# EAGLE board SmartMirror (EAGLE 9.6.2)
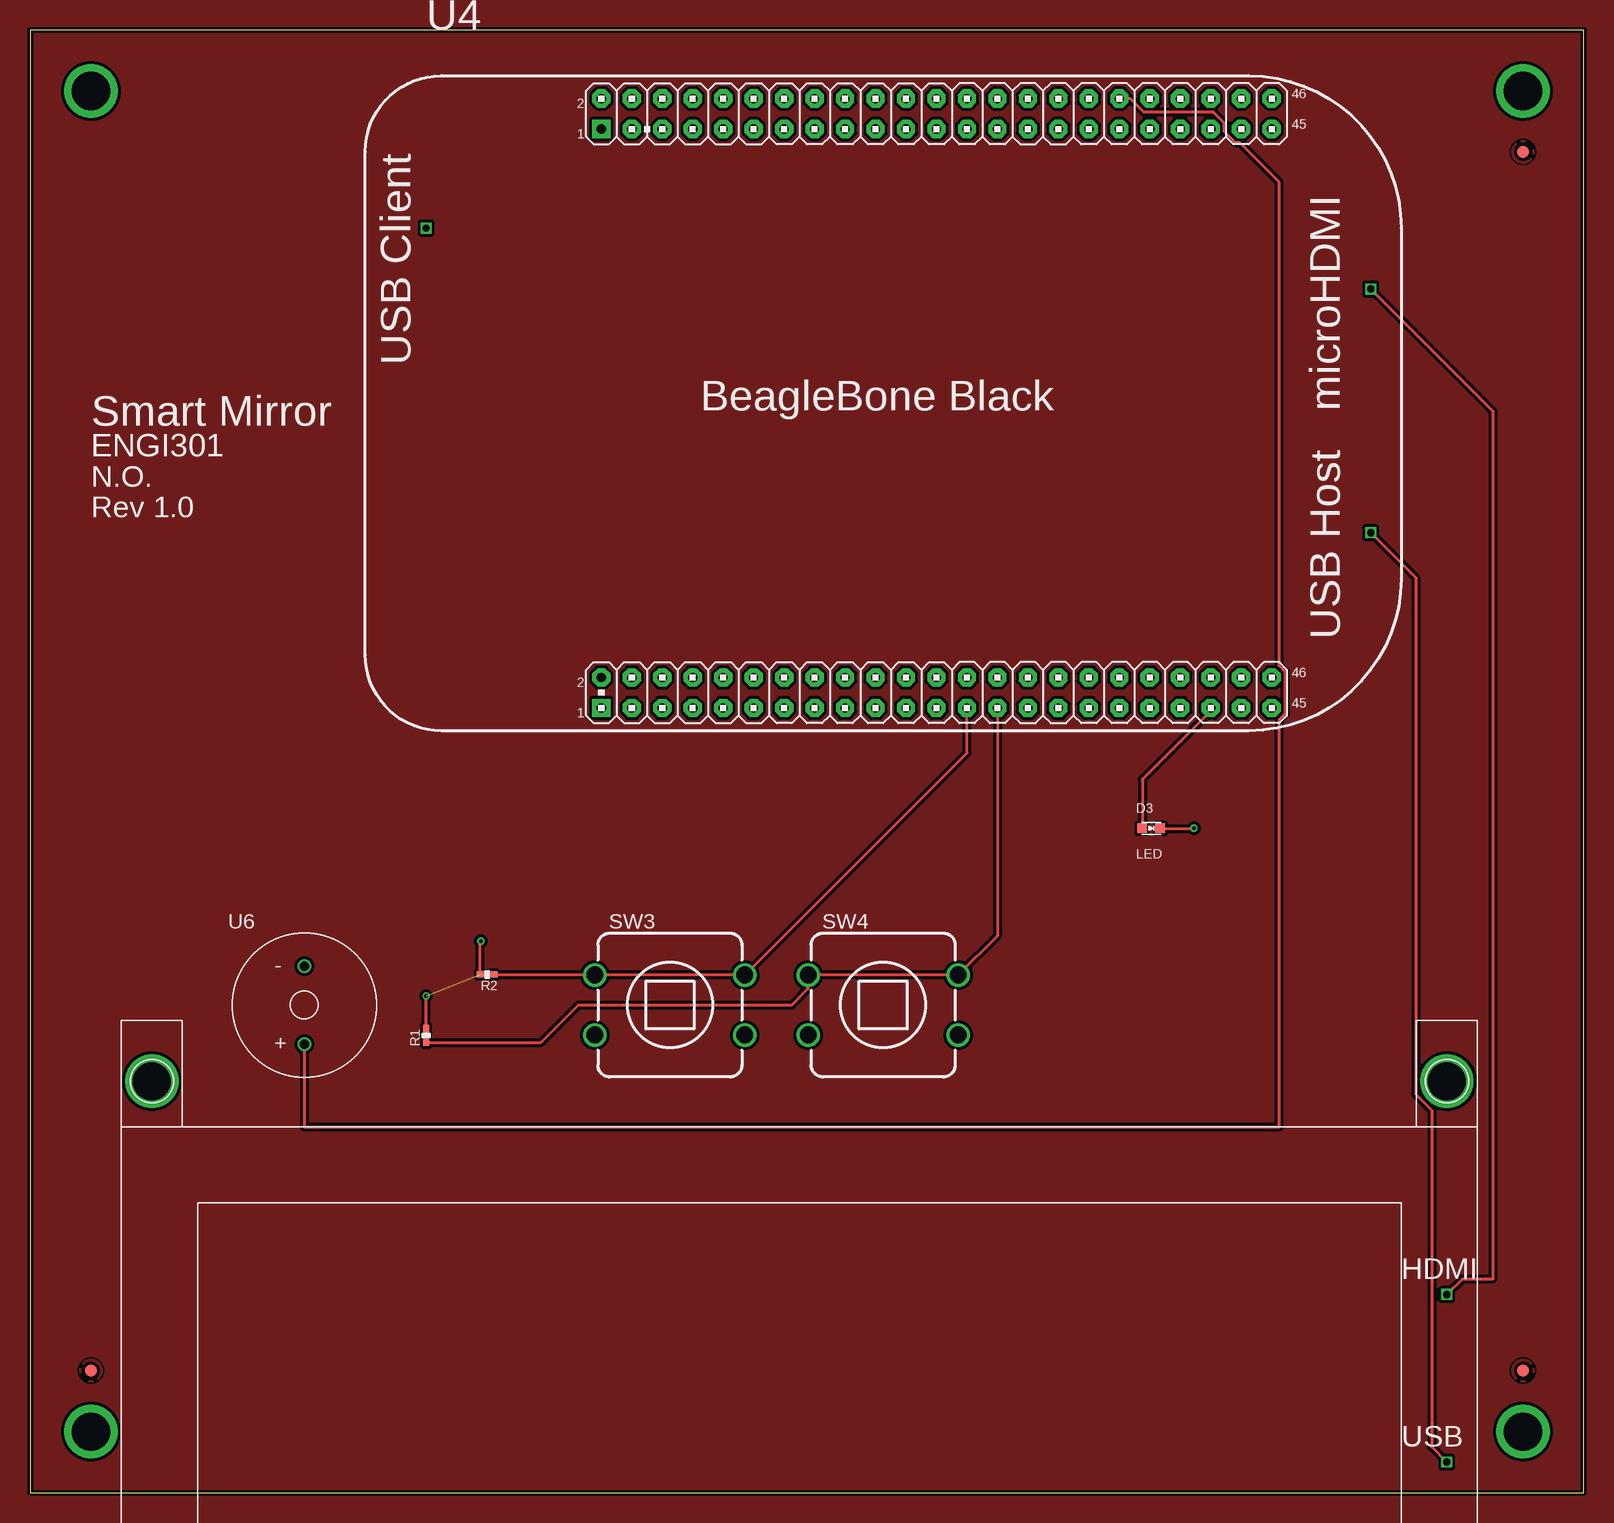
[diagram p0: board, top side]
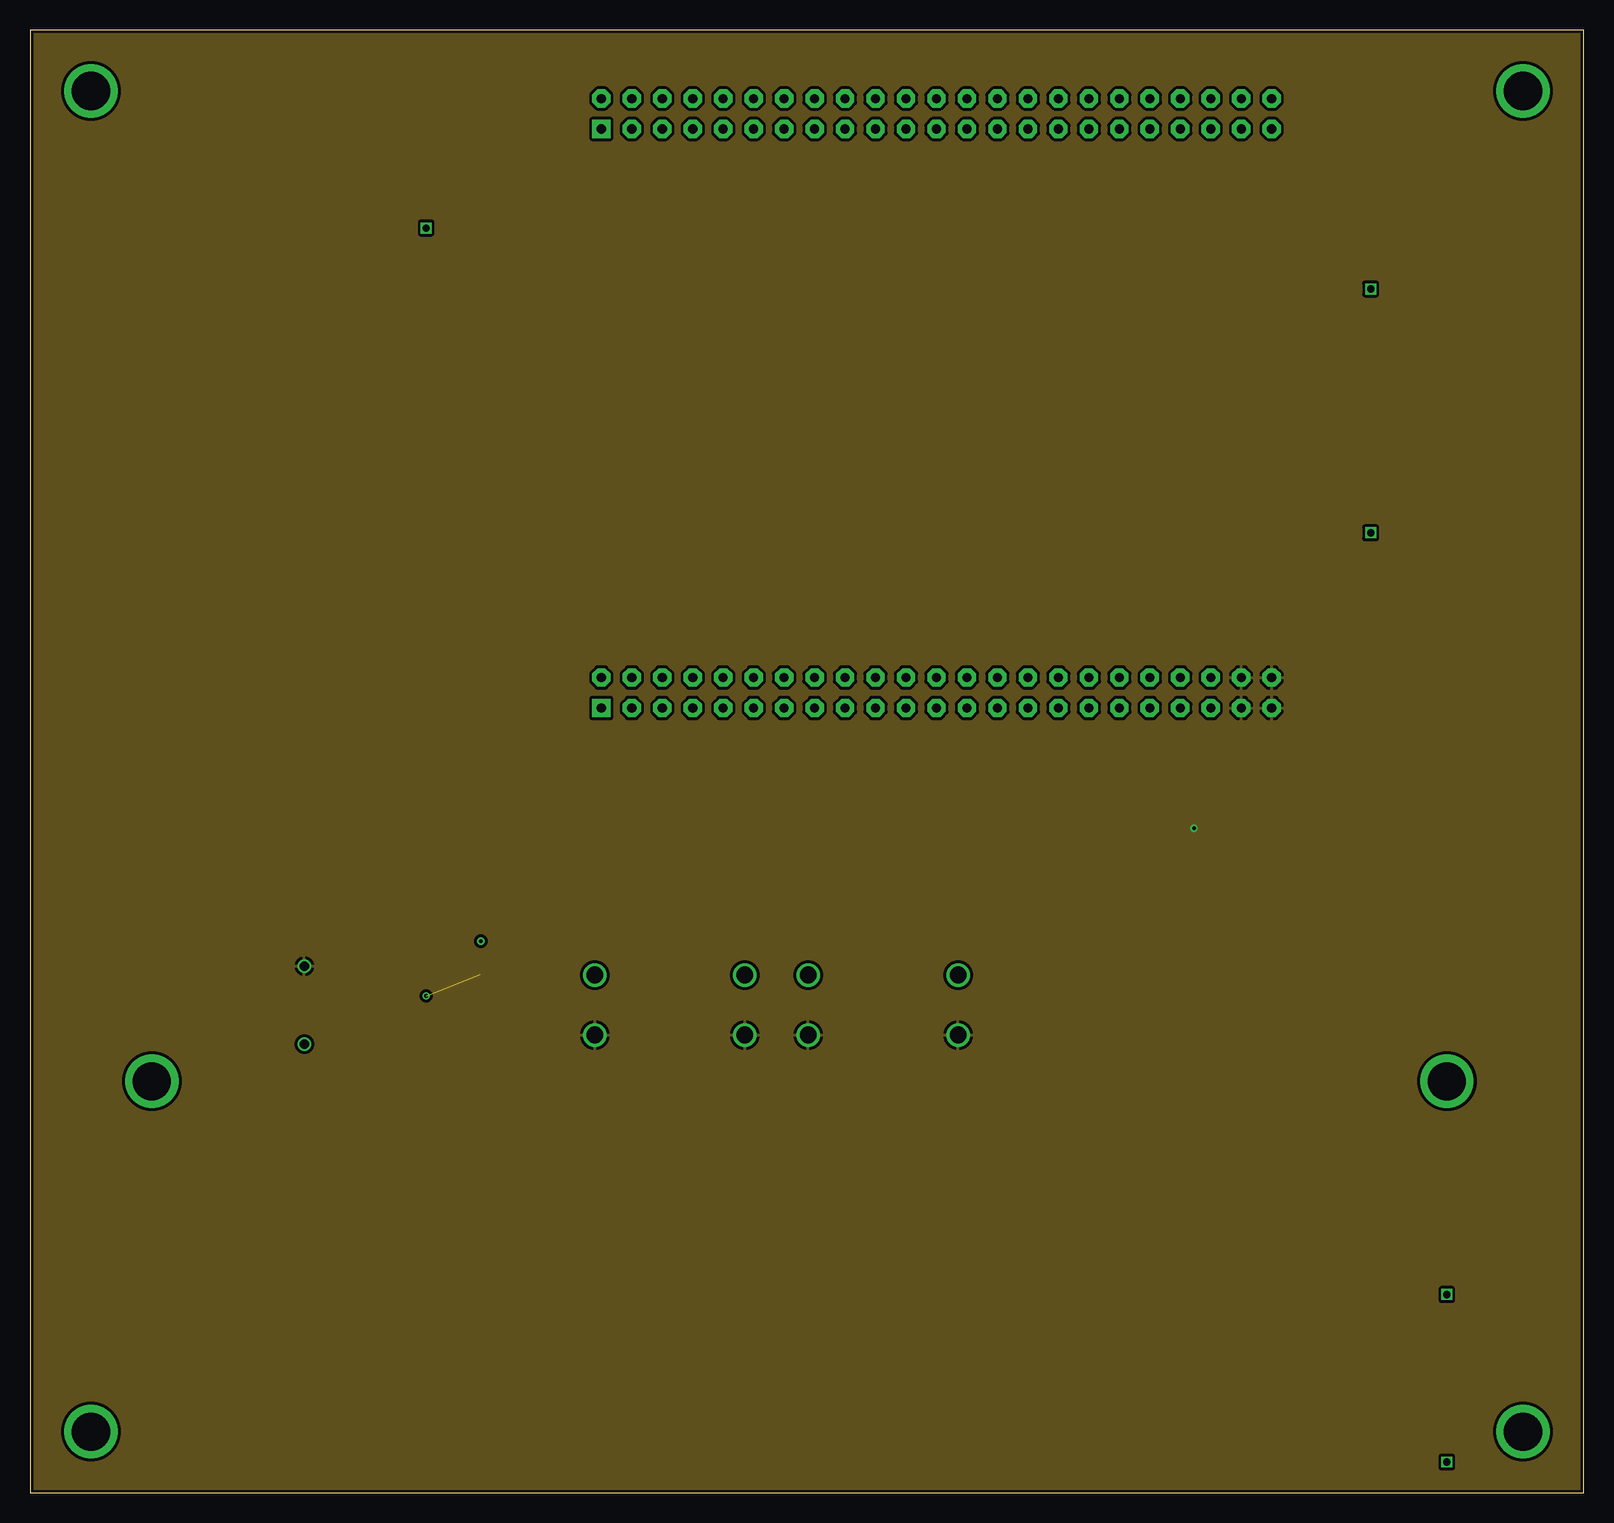
[diagram p1: board, inner layer Route2]
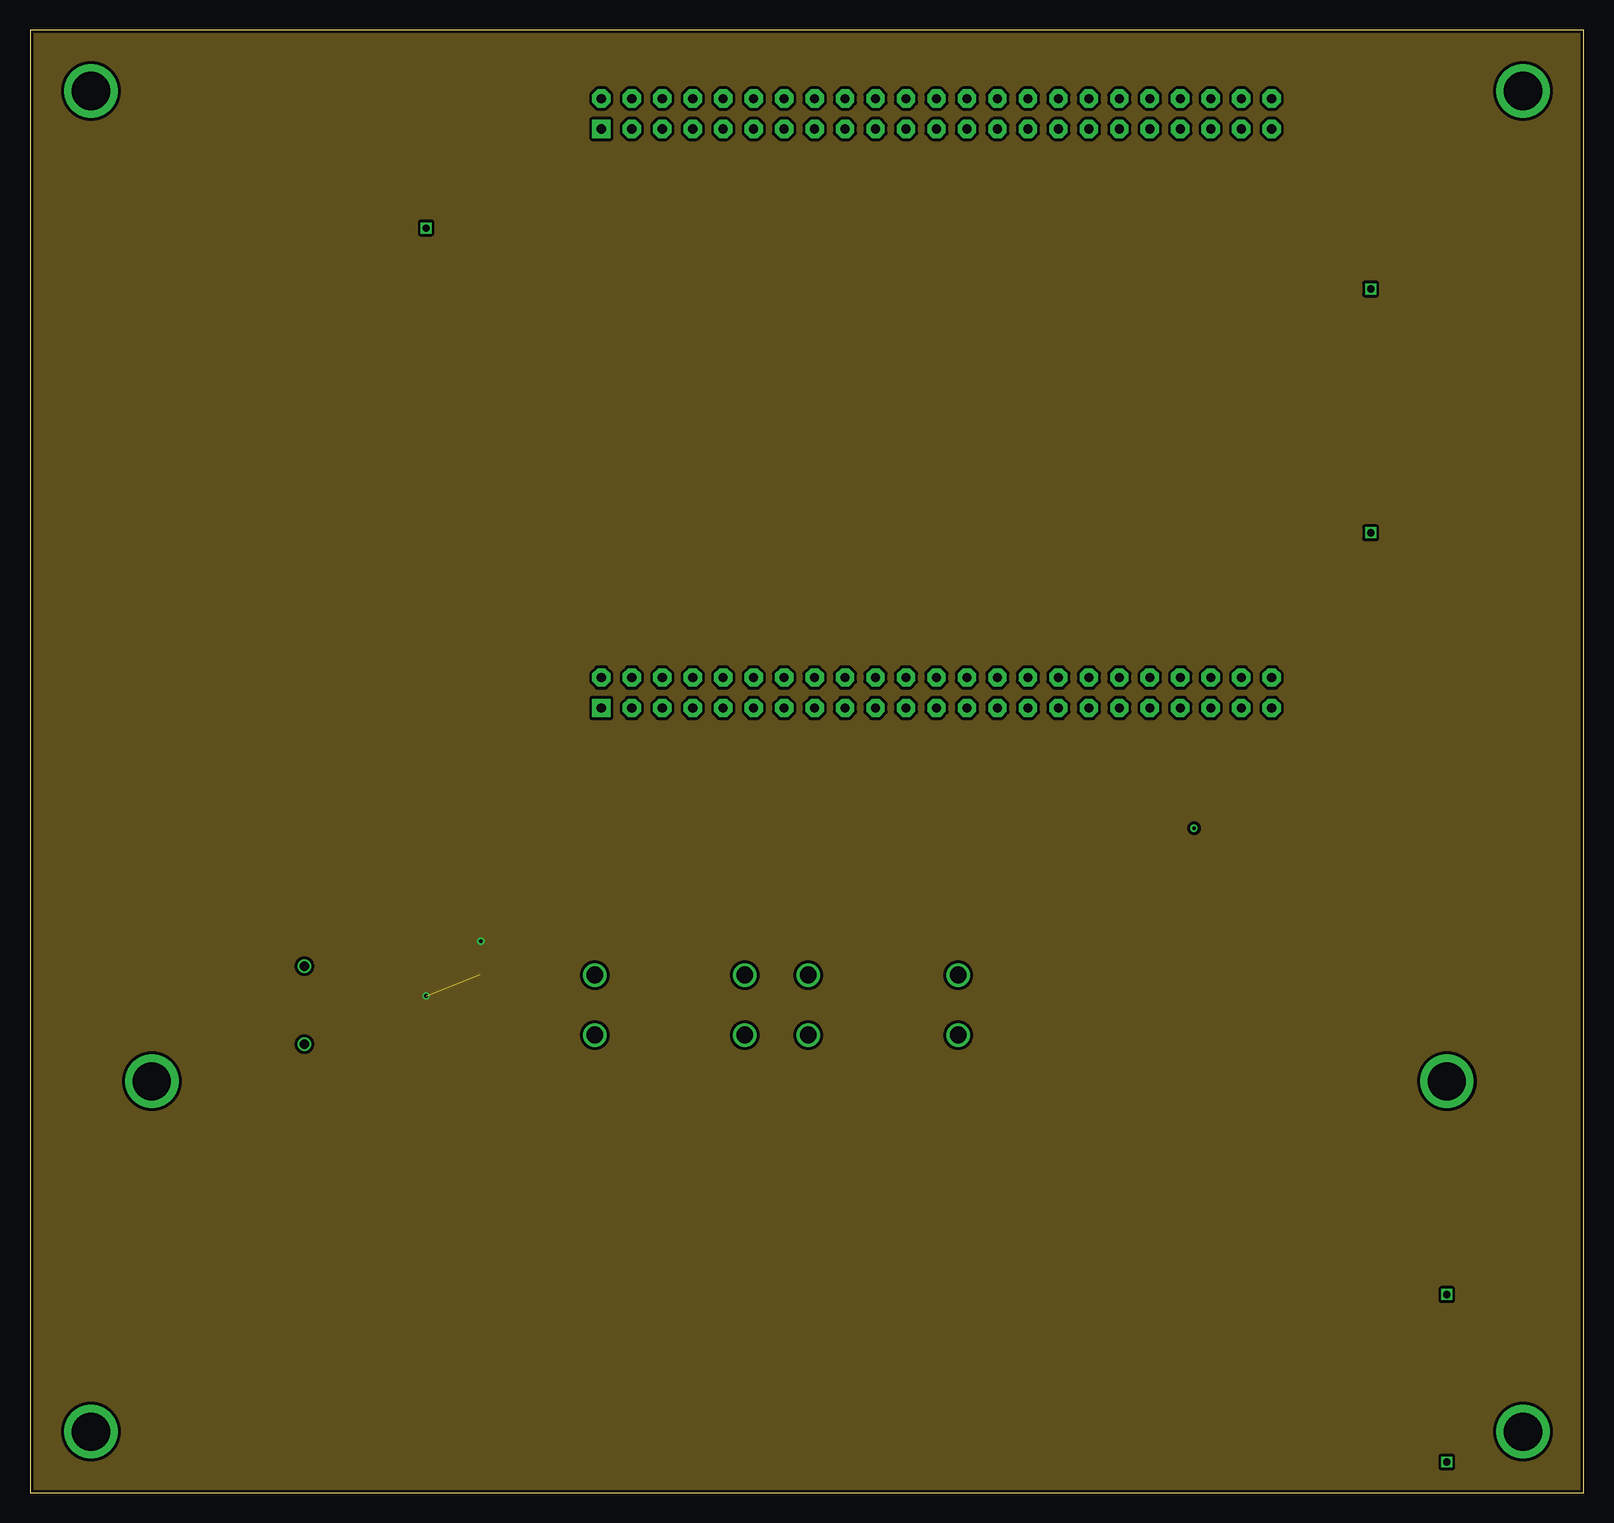
[diagram p2: board, inner layer Route15]
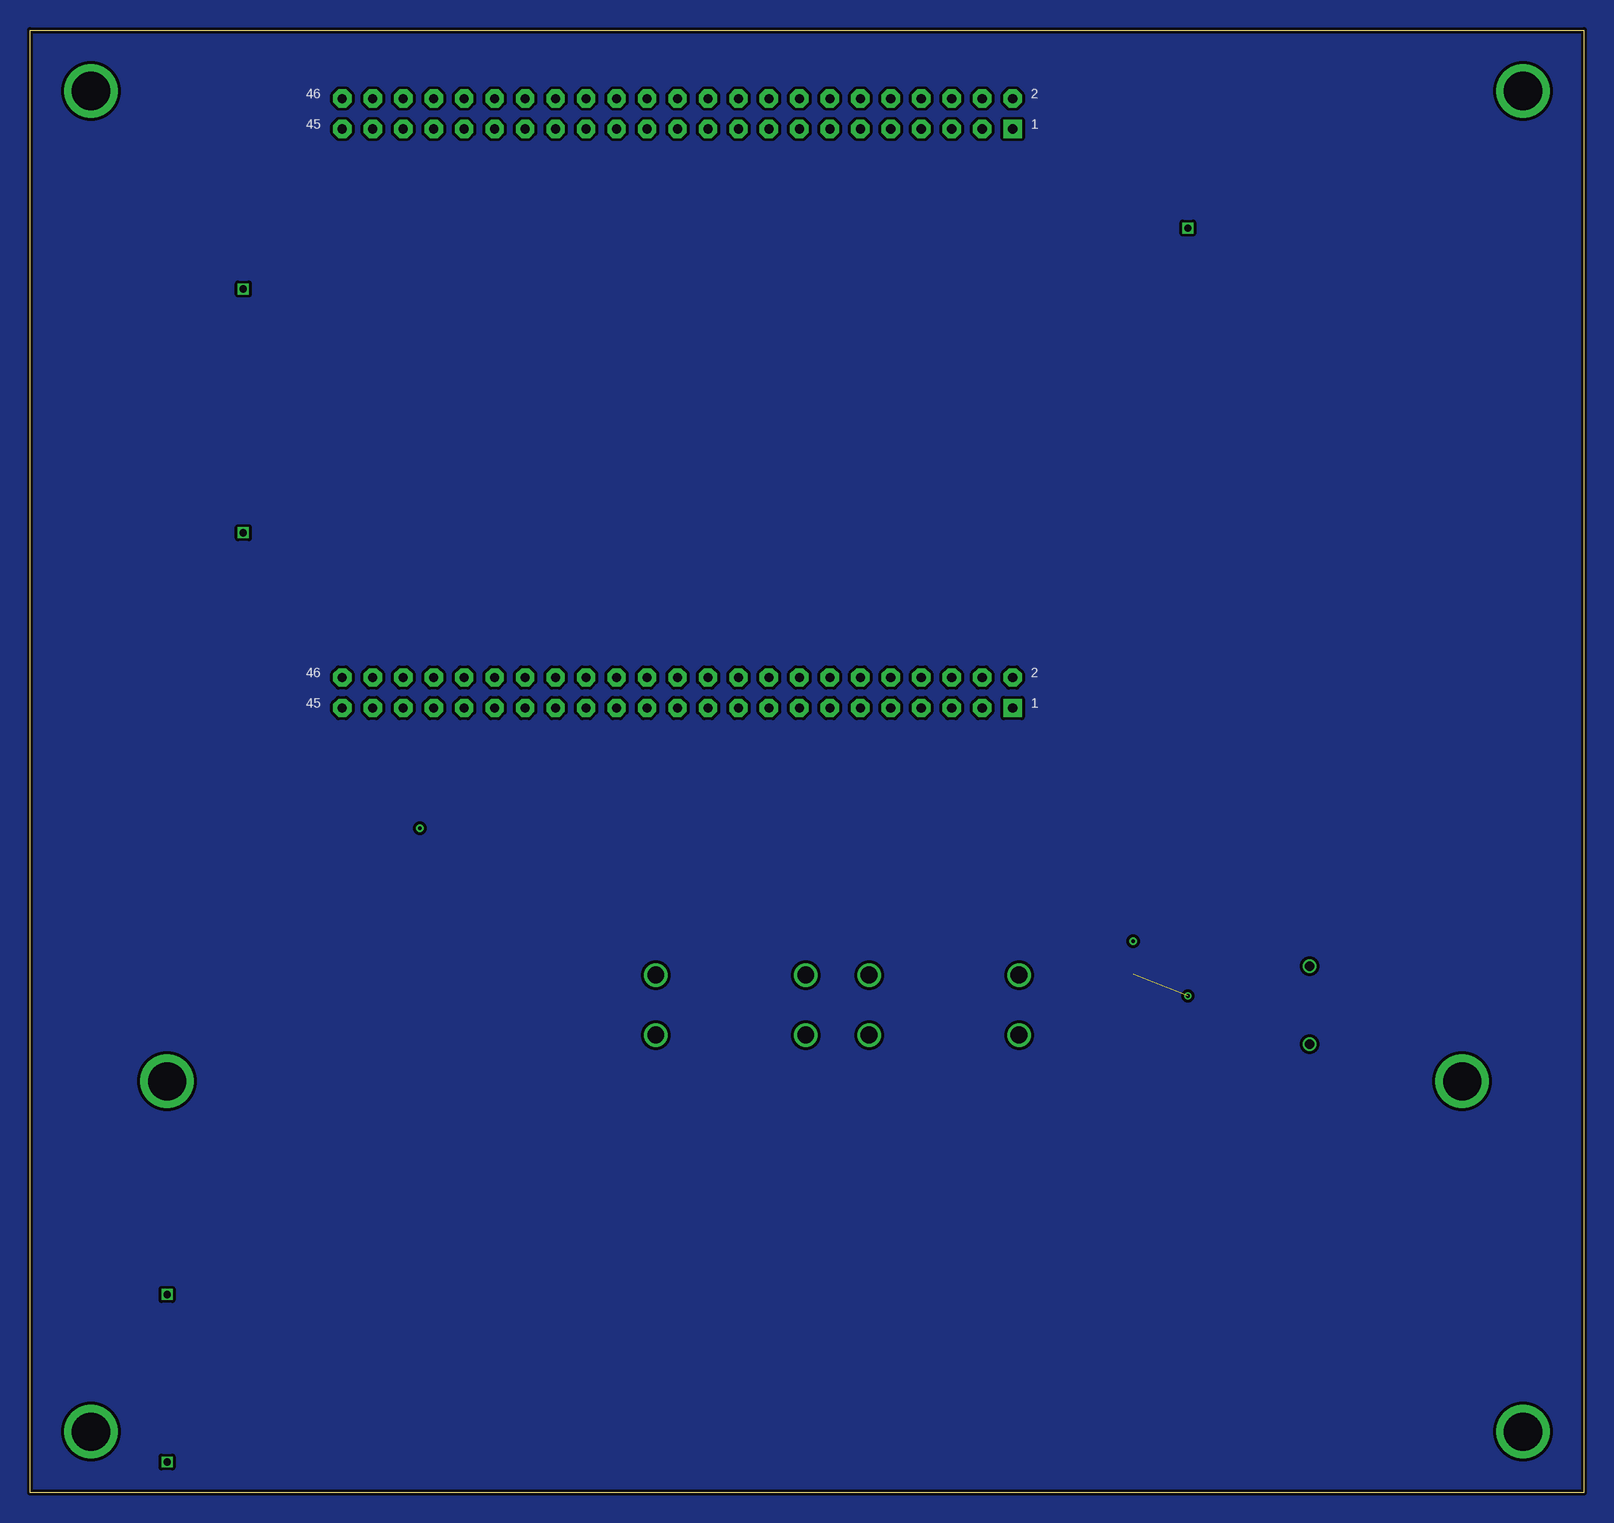
[diagram p3: board, bottom side, seen from below]

Size 129.54 x 121.92 mm. Coordinates in mm from the lower left corner, seen from the top.
Outline: 0,0 129.54,0 129.54,121.92 0,121.92 0,0
Copper layers (1*2*15*16): Top 0.035mm / dielectric 0.23mm / Route2 0.035mm / dielectric 0.93mm / Route15 0.035mm / dielectric 0.23mm / Bottom 0.035mm
Design rules "ENGI301_4lyr": minimum track width 10mil, minimum drill 12mil, track to track 10mil, track to pad 10mil, pad to pad 10mil, via to via 10mil, smd to smd 10mil, copper to edge 10mil, drill to drill 12mil, minimum pad ring 6mil, minimum via ring 6mil, stop-mask expansion 3mil, vias tented up to drill 25mil, thermal gap 10mil

## Footprints (pad centres in the part's own frame; a part is rotated, then mirrored left to right if it is on the bottom)
EIA-STD = smd 0.8 x 0.8: ANODE -0.75,0; CATHODE 0.75,0
FIDUCIAL_40MIL = smd 1.016 x 1.016: P$1 0,0
MOUNTING_HOLE = drill 3.175 pad 4.445: P$1 0,0
R0402 = smd 0.61 x 0.508: 1 -0.559,0; 2 0.559,0
BUTTON_12.5MM = drill 1.4: 1 -6.25,2.5; 2 -6.25,-2.5; 3 6.25,2.5; 4 6.25,-2.5
BEAGLEBONEBLACK = drill 0.762 pad 1.524 square: 1@P8 19.685,50.165; 1@P9 19.685,1.905 | drill 0.762 pad 1.524 octagon: 2@P8 19.685,52.705; 2@P9 19.685,4.445; 3@P8 22.225,50.165; 3@P9 22.225,1.905; 4@P8 22.225,52.705; 4@P9 22.225,4.445; 5@P8 24.765,50.165; 5@P9 24.765,1.905; 6@P8 24.765,52.705; 6@P9 24.765,4.445; 7@P8 27.305,50.165; 7@P9 27.305,1.905; 8@P8 27.305,52.705; 8@P9 27.305,4.445; 9@P8 29.845,50.165; 9@P9 29.845,1.905; 10@P8 29.845,52.705; 10@P9 29.845,4.445; 11@P8 32.385,50.165; 11@P9 32.385,1.905; 12@P8 32.385,52.705; 12@P9 32.385,4.445; 13@P8 34.925,50.165; 13@P9 34.925,1.905; 14@P8 34.925,52.705; 14@P9 34.925,4.445; 15@P8 37.465,50.165; 15@P9 37.465,1.905; 16@P8 37.465,52.705; 16@P9 37.465,4.445; 17@P8 40.005,50.165; 17@P9 40.005,1.905; 18@P8 40.005,52.705; 18@P9 40.005,4.445; 19@P8 42.545,50.165; 19@P9 42.545,1.905; 20@P8 42.545,52.705; 20@P9 42.545,4.445; 21@P8 45.085,50.165; 21@P9 45.085,1.905; 22@P8 45.085,52.705; 22@P9 45.085,4.445; 23@P8 47.625,50.165; 23@P9 47.625,1.905; 24@P8 47.625,52.705; 24@P9 47.625,4.445; 25@P8 50.165,50.165; 25@P9 50.165,1.905; 26@P8 50.165,52.705; 26@P9 50.165,4.445; 27@P8 52.705,50.165; 27@P9 52.705,1.905; 28@P8 52.705,52.705; 28@P9 52.705,4.445; 29@P8 55.245,50.165; 29@P9 55.245,1.905; 30@P8 55.245,52.705; 30@P9 55.245,4.445; 31@P8 57.785,50.165; 31@P9 57.785,1.905; 32@P8 57.785,52.705; 32@P9 57.785,4.445; 33@P8 60.325,50.165; 33@P9 60.325,1.905; 34@P8 60.325,52.705; 34@P9 60.325,4.445; 35@P8 62.865,50.165; 35@P9 62.865,1.905; 36@P8 62.865,52.705; 36@P9 62.865,4.445; 37@P8 65.405,50.165; 37@P9 65.405,1.905; 38@P8 65.405,52.705; 38@P9 65.405,4.445; 39@P8 67.945,50.165; 39@P9 67.945,1.905; 40@P8 67.945,52.705; 40@P9 67.945,4.445; 41@P8 70.485,50.165; 41@P9 70.485,1.905; 42@P8 70.485,52.705; 42@P9 70.485,4.445; 43@P8 73.025,50.165; 43@P9 73.025,1.905; 44@P8 73.025,52.705; 44@P9 73.025,4.445; 45@P8 75.565,50.165; 45@P9 75.565,1.905; 46@P8 75.565,52.705; 46@P9 75.565,4.445 | drill 0.6 square: P$1.USBC 5.08,41.91; P$2.HDMI 83.82,36.83; P$3.USBH 83.82,16.51
LCD = drill 0.6 square: HDMI 110.49,-13.97; USB 110.49,-27.94
BUZZER_6.5MM = drill 0.8: + 0,-3.25; - 0,3.25

## Placement (x,y rotation side)
D3  LED  [EIA-STD]  93.47,55.37 0 top
FUD1  FIDUCIAL  [FIDUCIAL_40MIL]  5.08,10.16 0 top
FUD2  FIDUCIAL  [FIDUCIAL_40MIL]  124.46,10.16 0 top
FUD3  FIDUCIAL  [FIDUCIAL_40MIL]  124.46,111.76 0 top
MGT1  MOUNTING_HOLE  [MOUNTING_HOLE]  118.11,34.29 0 top
MGT2  MOUNTING_HOLE  [MOUNTING_HOLE]  10.16,34.29 0 top
MGT3  MOUNTING_HOLE  [MOUNTING_HOLE]  5.08,5.08 0 top
MGT4  MOUNTING_HOLE  [MOUNTING_HOLE]  124.46,5.08 0 top
MGT5  MOUNTING_HOLE  [MOUNTING_HOLE]  5.08,116.84 0 top
MGT6  MOUNTING_HOLE  [MOUNTING_HOLE]  124.46,116.84 0 top
R1  1k  [R0402]  33.02,38.1 90 top
R2  1k  [R0402]  38.1,43.18 180 top
SW3  PUSH_BUTTON  [BUTTON_12.5MM]  53.34,40.64 0 top
SW4  PUSH_BUTTON  [BUTTON_12.5MM]  71.12,40.64 0 top
U4  BEAGLEBONEBLACK  [BEAGLEBONEBLACK]  27.94,63.5 0 top
U5  LCD  [LCD]  7.62,30.48 0 top
U6  BUZZER  [BUZZER_6.5MM]  22.86,40.64 0 top

## Library data of the parts
D3 FUD1-FUD3 MGT1-MGT6 R1 R2 SW3 SW4 U4-U6 = MISC

## Nets
GND: D3.CATHODE SW3.2 SW3.4 SW4.2 SW4.4 U4.43@P9 U4.44@P9 U4.45@P9 U4.46@P9 U6.-
N$1: U4.P$2.HDMI U5.HDMI
N$2: U4.P$3.USBH U5.USB
N$3: R1.1 SW4.1 SW4.3 U4.27@P9
N$4: U4.36@P8 U6.+
N$5: D3.ANODE U4.41@P9
N$7: R2.1 SW3.1 SW3.3 U4.25@P9
SYS5V: U4.6@P9
VDD.3V3: U4.3@P9
VDD_3P3V: R1.2 R2.2
VDD_5V: U4.P$1.USBC

## Tracks (layer width: path | path; a pad name or v marks a point on that pad's centre or on a via)
CGND
  pour Top: 127,111.76 127,40.64 111.76,40.64 111.76,30.48 127,30.48 127,10.16 119.38,10.16 119.38,2.54 10.16,2.54 10.16,10.16 2.54,10.16 2.54,30.48 17.78,30.48 17.78,40.64 2.54,40.64 2.54,111.76 10.16,111.76 10.16,119.38 119.38,119.38 119.38,111.76
  pour Top: -2.54,124.46 -2.54,-2.54 132.08,-2.54 132.08,124.46
  pour Bottom: 10.16,119.38 10.16,111.76 2.54,111.76 2.54,40.64 17.78,40.64 17.78,30.48 2.54,30.48 2.54,10.16 10.16,10.16 10.16,2.54 119.38,2.54 119.38,10.16 127,10.16 127,30.48 111.76,30.48 111.76,40.64 127,40.64 127,111.76 119.38,111.76 119.38,119.38
  pour Bottom: -2.54,124.46 -2.54,-2.54 132.08,-2.54 132.08,124.46
GND  (via drill 0.3 pad 0.61)
  Top 0.254: D3.CATHODE v97.03,55.37
  pour Route2: -2.54,124.46 -2.54,-2.54 132.08,-2.54 132.08,124.46 0,124.46
N$1
  Top 0.254: U4.P$2.HDMI 121.92,90.17 121.92,17.78 119.38,17.78 U5.HDMI
N$2
  Top 0.254: U4.P$3.USBH 115.51,76.26 115.51,33.21 116.84,31.88 116.84,3.81 U5.USB
N$3
  Top 0.254: R1.1 42.62,37.54 45.72,40.64 63.5,40.64 64.87,42.01 SW4.1 SW4.3 80.64,46.41 U4.27@P9
N$4
  Top 0.254: U6.+ 22.86,30.48 104.14,30.48 104.14,64.42 104.65,64.93 104.65,68.42 104.14,68.93 104.14,109.22 100.84,112.52 100.49,112.52 99.57,113.45 99.57,114.14 98.64,115.06 92.87,115.06 91.73,116.2 U4.36@P8
N$5
  Top 0.254: U4.41@P9 98.42,65.15 92.72,59.45 D3.ANODE
N$7
  Top 0.254: U4.25@P9 78.11,61.66 SW3.3 SW3.1 38.7,43.14 R2.1
VDD_3P3V  (via drill 0.3 pad 0.61)  (1 unrouted)
  Top 0.254: R1.2 v33.02,41.4 | R2.2 37.54,45.92 v37.59,45.97
  pour Route15: -5.08,127 -5.08,-5.08 134.62,-5.08 134.62,127
(copper drawn outside any net)
  shapes: Top area x6

## Text on the board
tPlace: Smart Mirror | ENGI301 | N.O. | Rev 1.0